# Altium PCB PCB_THALIA.PcbDoc
Units mil, origin at the board's own origin, x right, y up, seen from the top; angles counter-clockwise.
Board outline 1184.87 x 1635 mil, 2 copper layers (Top Layer, Bottom Layer); 32 components, 24 nets, 103 pads, 9 vias.
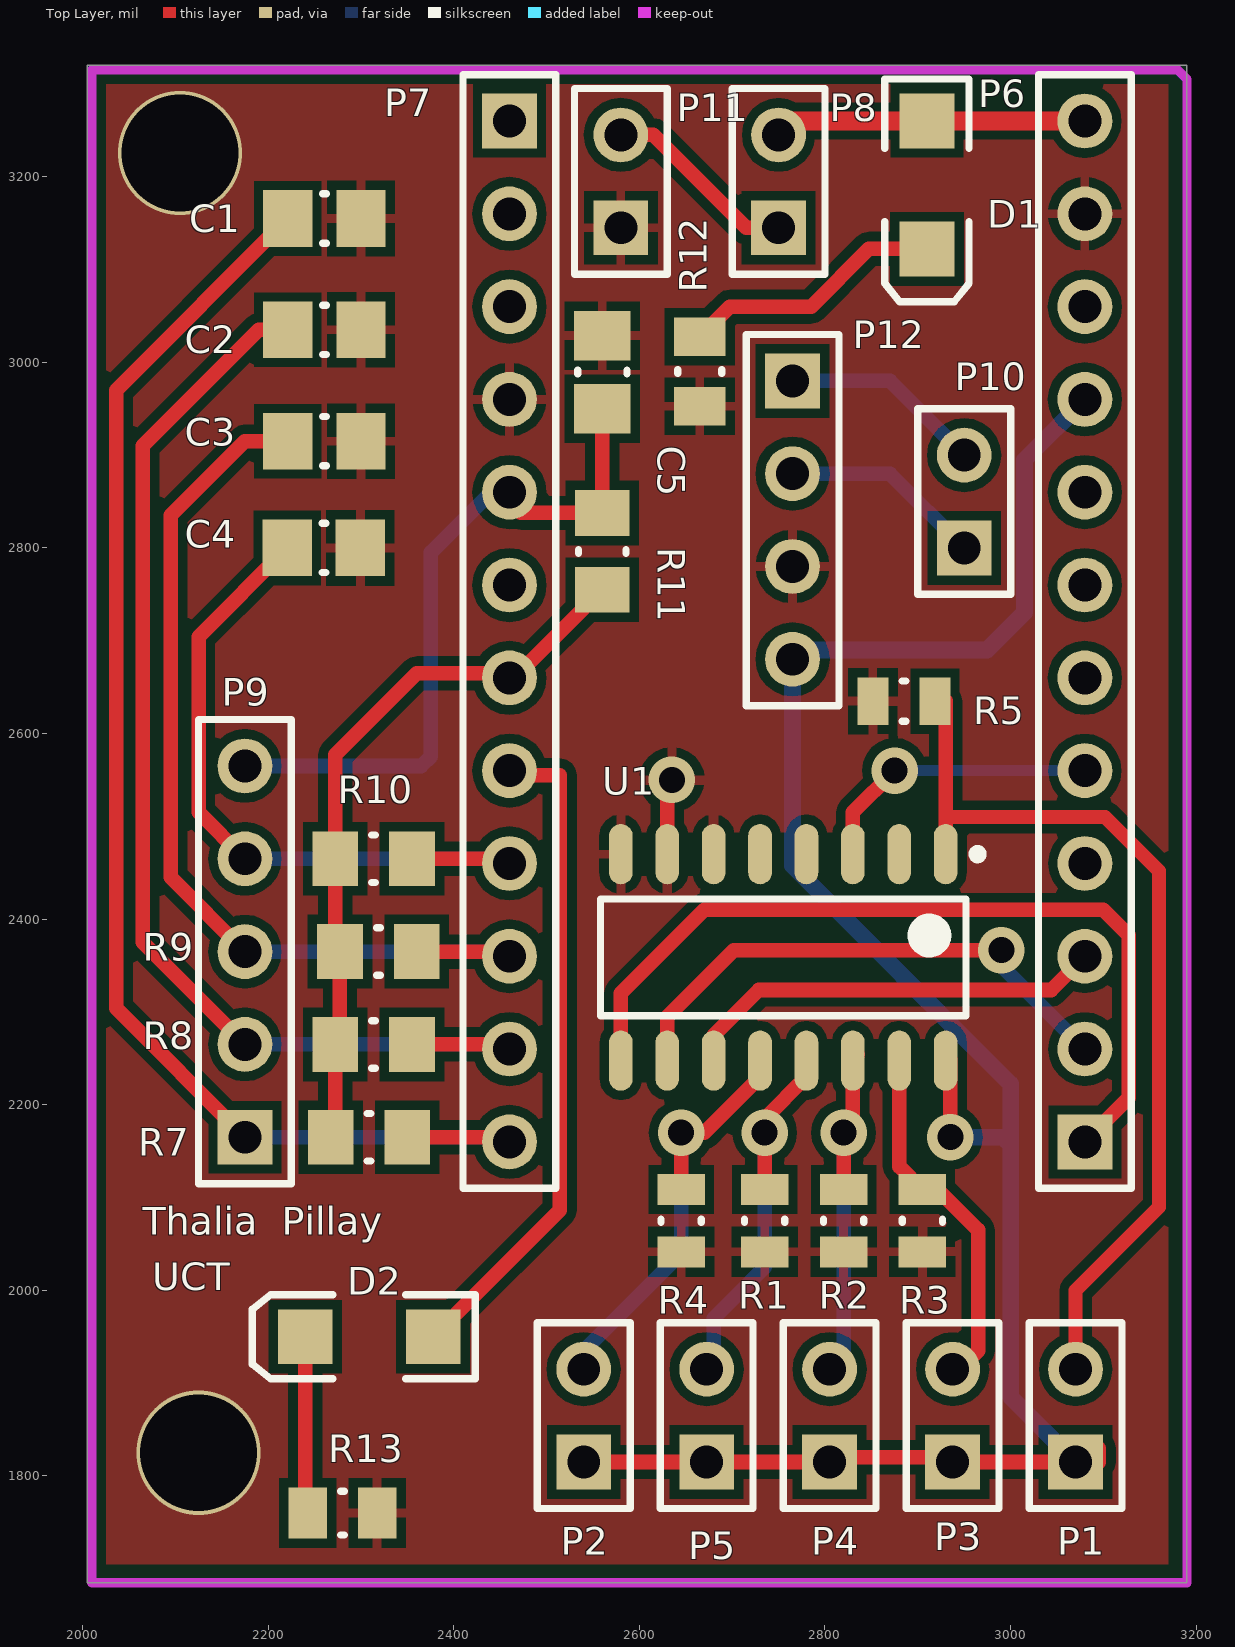
[diagram p0: Top Layer view]
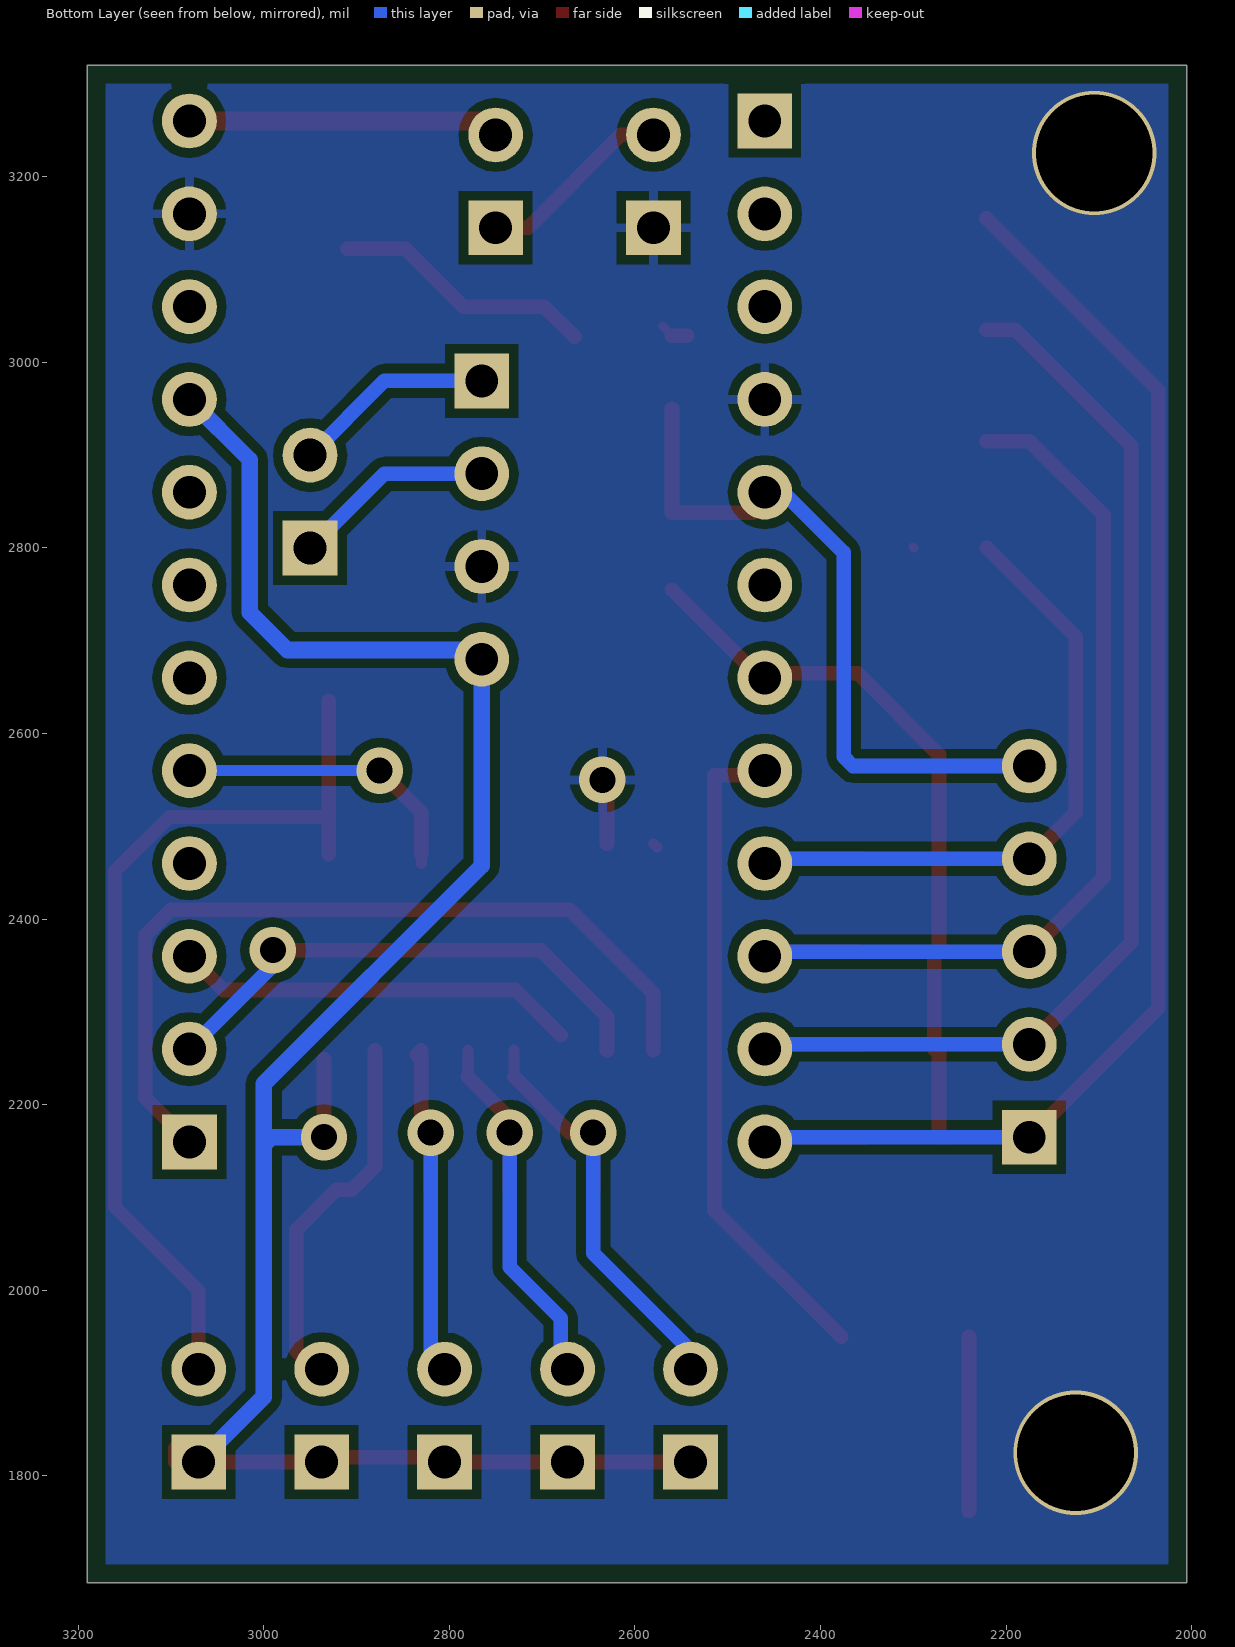
[diagram p1: Bottom Layer view, seen from below]

## Layer stack, top to bottom
Top Solder: solder mask 0.4, Solder Resist, Dk 3.5
Top Layer: signal copper 1.4
Dielectric 1: dielectric 12.6, FR-4, Dk 4.8
Bottom Layer: signal copper 1.4
Bottom Solder: solder mask 0.4, Solder Resist, Dk 3.5

## Board outline
2005.13,3320 3190,3320 3190,1685 2005.13,1685

## Design rules (kind name [scope] priority, off if disabled: settings)
BoardOutlineClearance [All] p1: gap=19.68 ignorepadtopadclearanceinfootprint=FALSE
Clearance [All] p1: gap=10 ignorepadtopadclearanceinfootprint=FALSE except(0: Arc-Hole Track-Hole SMDPad-Hole THPad-Hole Via-Hole Fill-Hole Poly-Hole Region-Hole Text-Hole)
PolygonConnect [All] p1: connectstyle=Relief reliefconductorwidth=10 reliefentries=4 polygonreliefangle="90 Angle" airgapwidth=10
RoutingVias [All] p1: holewidth=28 width=50 viastyle="Through Hole" minholewidth=28 minwidth=50 maxholewidth=28 maxwidth=50
SolderMaskExpansion [All] p1: expansion=4
Width [All] p1: maxlimit=78.74 minlimit=11.81 preferedwidth=15.75
30 further rules are at their usual default settings.

## Components (designator, comment, footprint, x,y, rotation, side; value= is the part's Value field where it differs from the comment)
C1 "CAP 100pF 10V 0805(2012)" CAPC0805(2012)100_M 2260.63,3155 r180 top value=100pF
C2 "CAP 100pF 10V 0805(2012)" CAPC0805(2012)100_M 2260.63,3035 r180 top value=100pF
C3 "CAP 100pF 10V 0805(2012)" CAPC0805(2012)100_M 2260.63,2915 r180 top value=100pF
C4 "CAP 100pF 10V 0805(2012)" CAPC0805(2012)100_M 2260,2800 r180 top value=100pF
C5 "CAP 100pF 10V 0805(2012)" CAPC0805(2012)100_M 2560,2989.37 r270 top value=100pF
D1 "GREEN" 3.2X1.6X1.1 2909.8,3191.1 r270 top (schematic designator D?)
D2 "GREEN" 3.2X1.6X1.1 2308.9,1950 r180 top
P1 "pinky" HDR1X2 3070,1815 r90 top
P2 "ring" HDR1X2 2540,1815 r90 top
P3 "middle" HDR1X2 2937.5,1815 r90 top
P4 "index" HDR1X2 2805,1815 r90 top
P5 "thumb" HDR1X2 2672.5,1815 r90 top
P6 "Header 12" HDR1X12 3080,2160 r90 top
P7 "Header 12" HDR1X12 2460,3260 r270 top
P8 "TOGGLE" HDR1X2 2750,3145 r90 top
P9 "Header 5" HDR1X5 2175,2165 r90 top
P10 "IMU HEADER" HDR1X2 2950,2800 r90 top
P11 "BATTERY" HDR1X2 2580,3145 r90 top
P12 "ADAFRUIT BNO055" HDR1X4 2765,2980 r270 top
R1 "47K 5% 0805(2012)" RESC0805(2012)_L 2735,2075 r90 top value="47000.00 Ohm"
R2 "47K 5% 0805(2012)" RESC0805(2012)_L 2820,2075 r90 top value="47000.00 Ohm"
R3 "47K 5% 0805(2012)" RESC0805(2012)_L 2905,2075 r90 top value="47000.00 Ohm"
R4 "47K 5% 0805(2012)" RESC0805(2012)_L 2645,2075 r90 top value="47000.00 Ohm"
R5 "47K 5% 0805(2012)" RESC0805(2012)_L 2885,2635 r0 top value="47000.00 Ohm"
R7 "10M 5% 0805(2012)" RESC0805(2012)_M 2308.66,2165 r180 top value="10000000.00 Ohm"
R8 "10M 5% 0805(2012)" RESC0805(2012)_M 2313.66,2265 r180 top value="10000000.00 Ohm"
R9 "10M 5% 0805(2012)" RESC0805(2012)_M 2318.66,2365 r180 top value="10000000.00 Ohm"
R10 "10M 5% 0805(2012)" RESC0805(2012)_M 2313.66,2465 r180 top value="10000000.00 Ohm"
R11 "10M 5% 0805(2012)" RESC0805(2012)_M 2560,2796.34 r270 top value="10000000.00 Ohm"
R12 "240R 5% 0805(2012)" RESC0805(2012)_N 2665,2990 r90 top value="240.00 Ohm"
R13 "240R 5% 0805(2012)" RESC0805(2012)_N 2280,1760 r180 top value="240.00 Ohm"
U1 "CD4051BM96G3" D0016A_M 2755,2358.78 r270 top

## Footprints (in the part's own frame and the unit in brackets; to place one, negate y for a bottom-side part, rotate by r counter-clockwise, add the part's x,y. Pads: shape width x height; smd on the part's side, far side on the other; paste and mask are expansions set on the pad)
3.2X1.6X1.1 [mm] "SMT LED; 2 Flat Leads"
  rect 1.5x1.5 smd: 1(-1.75,0) 2(1.75,0)
  silkscreen extent -2.9,-1.15 3.2,1.15
CAPC0805(2012)100_M [mm] "Chip Capacitor, Body 2.0x1.2mm, Height 1.0mm, IPC Low Density"
  rect 1.35x1.55 smd: 1(-1,0) 2(1,0)
  silkscreen extent -0.05,-0.67 0.05,0.67, body extent -1.1,-0.72 1.1,0.72, height 1
D0016A_M [mm] "SOIC, 16-Leads, Body 10x4mm, Pitch 1.27mm, IPC Low Density"
  oval 1.65x0.65 smd: 1(-2.825,4.445) 2(-2.825,3.175) 3(-2.825,1.905) 4(-2.825,0.635) 5(-2.825,-0.635) 6(-2.825,-1.905) 7(-2.825,-3.175) 8(-2.825,-4.445) 9(2.825,-4.445) 10(2.825,-3.175) 11(2.825,-1.905) 12(2.825,-0.635) 13(2.825,0.635) 14(2.825,1.905) 15(2.825,3.175) 16(2.825,4.445)
  silkscreen extent -2.95,-5 1.6,5.45, body extent -3,-4.95 3,4.95, height 1.59
HDR1X2 [mm] "Connector; Header; 2 Position"
  rect 1.5x1.5 hole 0.9: 1(0,0)
  round 1.5 hole 0.9: 2(2.54,0)
  silkscreen extent -1.27,-1.27 3.81,1.27
HDR1X4 [mm] "Connector; Header; 4 Position"
  rect 1.5x1.5 hole 0.9: 1(0,0)
  round 1.5 hole 0.9: 2(2.54,0) 3(5.08,0) 4(7.62,0)
  silkscreen extent -1.27,-1.27 8.89,1.27
HDR1X5 [mm] "Connector; Header; 5 Position"
  rect 1.5x1.5 hole 0.9: 1(0,0)
  round 1.5 hole 0.9: 2(2.54,0) 3(5.08,0) 4(7.62,0) 5(10.16,0)
  silkscreen extent -1.27,-1.27 11.43,1.27
HDR1X12 [mm] "Connector; Header; 12 Position"
  rect 1.5x1.5 hole 0.9: 1(0,0)
  round 1.5 hole 0.9: 2(2.54,0) 3(5.08,0) 4(7.62,0) 5(10.16,0) 6(12.7,0) 7(15.24,0) 8(17.78,0) 9(20.32,0) 10(22.86,0) 11(25.4,0) 12(27.94,0)
  silkscreen extent -1.27,-1.27 29.21,1.27
RESC0805(2012)_L [mm] "Chip Resistor, Body 2.0x1.3mm, IPC High Density"
  rect 0.85x1.3 smd: 1(-0.85,0) 2(0.85,0)
  silkscreen extent -0.05,-0.55 0.05,0.55, body extent -1.1,-0.67 1.1,0.68, height 0.7
RESC0805(2012)_M [mm] "Chip Resistor, Body 2.0x1.3mm, IPC Low Density"
  rect 1.25x1.5 smd: 1(-1.05,0) 2(1.05,0)
  silkscreen extent -0.05,-0.65 0.05,0.65, body extent -1.1,-0.67 1.1,0.67, height 0.7
RESC0805(2012)_N [mm] "Chip Resistor, Body 2.0x1.3mm, IPC Medium Density"
  rect 1.05x1.4 smd: 1(-0.95,0) 2(0.95,0)
  silkscreen extent -0.05,-0.6 0.05,0.6, body extent -1.1,-0.67 1.1,0.68, height 0.7

## Part data
C1 C2 C3 C4 C5: library part CMP-1036-01932-1, "CAP 100pF 10V ±5% 0805 (2012 Metric) Thickness 1mm SMD", Case-EIA=0805, Case-Metric=2012, Rated Voltage="10 V", Tolerance=±5%, Max Thickness="1 mm", Technology=SMT
D1 D2: library part LED2, "Typical RED, GREEN, YELLOW, AMBER GaAs LED", LatestRevisionDate=17-Jul-2002, LatestRevisionNote="Re-released for DXP Platform.", PackageDescription="SM LED; 2 Flat Leads", PackageReference=3.2X1.6X1.1, PackageVersion=Feb-2002, Published=8-Jun-2000, Publisher="Altium Limited"
P1 P2 P3 P4 P5 P8 P10 P11: library part "Header 2", "Header, 2-Pin", LatestRevisionDate=17-Jul-2002, LatestRevisionNote="Re-released for DXP Platform.", Publisher="Altium Limited"
P6 P7: "Header, 12-Pin", LatestRevisionDate=17-Jul-2002, LatestRevisionNote="Re-released for DXP Platform.", Publisher="Altium Limited"
P9: "Header, 5-Pin", LatestRevisionDate=17-Jul-2002, LatestRevisionNote="Re-released for DXP Platform.", Publisher="Altium Limited"
P12: library part "Header 4", "Header, 4-Pin", LatestRevisionDate=17-Jul-2002, LatestRevisionNote="Re-released for DXP Platform.", Publisher="Altium Limited"
R1 R2 R3 R4 R5: library part CMP-1013-00114-1, "47K 0.125W 5% 0805 (2012 Metric)  SMD", Case-EIA=0805, Case-Metric=2012, Power="0.125 W", Tolerance="5 %", Technology=SMT
R7 R8 R9 R10 R11: library part CMP-1013-00170-1, "10M 0.125W 5% 0805 (2012 Metric)  SMD", Case-EIA=0805, Case-Metric=2012, Power="0.125 W", Tolerance="5 %", Technology=SMT
R12 R13: library part CMP-1013-00059-1, "240R 0.125W 5% 0805 (2012 Metric)  SMD", Case-EIA=0805, Case-Metric=2012, Power="0.125 W", Tolerance="5 %", Technology=SMT
U1: library part CMP-1575-00039-2, "CMOS Single 8-Channel Analog Multiplexer/Demultiplexer with Logic-Level Conversion, D0016A, LARGE T&R", Operating Temperature Range(C)="-55 to 125", Part Number=CD4051B, Rating=Military, Bandwidth(Max)(MHz)=20, Code_IPC="MS-012 variation AC", ComponentLink1Description="Manufacturer URL", ComponentLink1URL=http://www.ti.com/, ComponentLink2Description=Datasheet, ComponentLink2URL=http://www.ti.com/lit/ds/symlink/cd4051b.pdf, Configuration="1 X 1:8 MUX", Crosstalk=Yes, DatasheetVersion=SCHS047G, ICC(Typ)(mA)=0.00008, Output Drive (IOL/IOH)(Max)(mA)=1, Output Type=CMOS, PackageReference=D0016A, PackageVersion=http://www.ti.com/lit/ml/mpds178g/mpds178g.pdf, PartNumber=CD4051BM96G3, Ron(Max)(Ohms)=240, Ron(Typ)(Ohms)=125, VCC(Max)(V)=18, VCC(Min)(V)=5

## Via types
v1: diameter 50, hole 28, Top Layer to Bottom Layer, tented top, 4 vias
v2: diameter 50, hole 28, Top Layer to Bottom Layer, 3 vias
v3: diameter 133.86, hole 125.98, Top Layer to Bottom Layer, 2 vias

## Nets (pads, with @x,y where several pads share a name; then routed paths per layer and width w, separated by ;. In a path a pad name is that pad's centre, name@x,y a point inside that pad or via, vN(x,y) a via of type N, cw(c..) or ccw(c..) an arc to the next point about the centre after c; other vN are vias at no path point)
A0: P6.5 U1.3 | length 323.6
  Top Layer w11.81: U1.3@2830,2460 U1.3
  Top Layer w15.75: U1.3 2830,2515 v1(2875,2560)
  Bottom Layer w11.81: v1(2875,2560) P6.5
A4: P10.1 P12.2 | length 218.1
  Bottom Layer w15.75: P12.2 2870,2880 P10.1
A5: P10.2 P12.1 | length 218.1
  Bottom Layer w15.75: P12.1 2870,2980 P10.2
GND: C1.1 C2.1 C3.1 C4.1 C5.1 P6.11 P7.4 P11.1 P12.3 R1.1 R2.1 R3.1 R4.1 R5.1 R12.1 R13.1 U1.6 U1.7 U1.8 | length 132.5
  Top Layer w10: C4.1 C4.1@2300,2800.63 ; C5.1 C5.1@2570,3038.74
  Top Layer w11.81: U1.8@2576.22,2477.44 U1.8@2580,2481.22
  Top Layer w15.75: P7.4@2460,2965 P7.4@2480,2965 ; C5.1@2543.74,3028.74 C5.1 ; U1.7@2630,2481.22 2630,2545 v1(2635,2550) ; P12.3@2760,2780 P12.3
  other v3: 2125,1825 2105,3225.47
NetD1_2: D1.2 R12.2 | length 284.1
  Top Layer w15.75: R12.2 2697.6,3060 2785,3060 2847.2,3122.2 D1.2
NetD2_2: D2.2 R13.2 | length 191.1
  Top Layer w10: R13.2@2240,1762.6 R13.2
  Top Layer w15.75: R13.2@2240,1762.6 D2.2
NetP1_2: P1.2 R5.2 U1.1 | length 993.1
  Top Layer w15: 2930,2510 3101.65,2510 3160,2451.65 3160,2090 3070,2000 P1.2
  Top Layer w15.75: U1.1 2930,2510 R5.2@2930,2635
NetP2_2: P2.2 R4.2 U1.12 | length 498.7
  Top Layer w11.81: v2(2645,2170) 2670,2170 ; U1.12@2730,2230 U1.12 U1.12@2730,2258.78
  Top Layer w15.75: R4.2 v2(2645,2170) ; 2670,2170 U1.12@2730,2230
  Bottom Layer w11.81: P2.2 P2.2@2540,1935
  Bottom Layer w15.75: P2.2@2540,1935 2645,2040 v2(2645,2170)
NetP3_2: P3.2 R3.2 U1.15 | length 397
  Top Layer w15.75: U1.15@2880,2258.78 2880,2133.46 R3.2 2921.54,2108.46 2965,2065 2965,1935 P3.2@2945,1915
NetP4_2: P4.2 R2.2 U1.14 | length 418.6
  Top Layer w15.75: R2.2 v2(2820,2170) 2830,2180 2830,2258.78 U1.14@2835,2253.78
  Bottom Layer w15.75: P4.2@2815,1915 2820,1920 v2(2820,2170)
NetP5_2: P5.2 R1.2 U1.13 | length 446.7
  Top Layer w11.81: v2(2735,2170) v2@2735,2185 ; U1.13@2780,2230 U1.13@2780,2258.78
  Top Layer w15.75: R1.2 v2(2735,2170) ; v2@2735,2185 U1.13@2780,2230
  Bottom Layer w15.75: P5.2@2680,1915 2680,1970 2735,2025 v2(2735,2170)
NetP8_1: P8.1 P11.2 | length 221.4
  Top Layer w15.75: P11.2@2570,3245 P11.2 2615,3245 2715,3145 P8.1
PIN2: C5.2 P7.5 P9.5 R11.1 | length 761.8
  Top Layer w15.75: P7.5@2445,2865 2472.32,2837.68 R11.1 C5.2
  Bottom Layer w15.75: P9.5 2365,2565 2375,2575 2375,2795 P7.5@2445,2865
PIN4: P7.7 R7.2 R8.2 R9.2 R10.2 R11.2 | length 789.8
  Top Layer w10: P7.7@2445,2665 P7.7@2470,2665
  Top Layer w11.81: R8.2@2272.32,2255 R8.2@2277.32,2260
  Top Layer w15.75: R7.2 2272.32,2170 2272.32,2255 R8.2 ; R8.2@2277.32,2260 R9.2 2272.32,2370 R10.2 2272.32,2577.32 2360,2665 P7.7@2445,2665 ; P7.7@2470,2665 R11.2
PIN5: D2.1 P7.8 | length 734.9
  Top Layer w10: P7.8@2445,2565 P7.8@2455,2555
  Top Layer w15.75: D2.1 2514.25,2086.46 2514.25,2555 P7.8@2455,2555
PIN6: C4.2 P7.9 P9.4 R10.1 | length 755.3
  Top Layer w15.75: P9.4 2125,2515 2125,2704.37 C4.2 ; R10.1 P7.9@2445,2465
  Bottom Layer w15.75: P9.4 P7.9@2445,2465
PIN7: C3.2 P7.10 P9.3 R9.1 | length 1017.5
  Top Layer w15.75: P9.3 2095,2445 2095,2835 2175,2915 C3.2 ; R9.1 P7.10@2445,2365
  Bottom Layer w15.75: P9.3 P7.10@2445,2365
PIN8: C2.2 P7.11 P9.2 R8.1 | length 1258.6
  Top Layer w15.75: P9.2 2065,2375 2065,2910 2190,3035 C2.2 ; R8.1 P7.11@2445,2265
  Bottom Layer w15.75: P9.2 P7.11@2445,2265
PIN9: C1.2 P7.12 P9.1 R7.1 | length 1489.1
  Top Layer w15.75: P9.1 2036.22,2303.78 2036.22,2969.96 C1.2 ; R7.1 P7.12@2445,2165
  Bottom Layer w15.75: P9.1 P7.12@2445,2165
PIN10: P6.1 U1.9 | length 918
  Top Layer w15.75: U1.9@2580,2258.78 2580,2320 2670,2410 3100,2410 3127.4,2382.6 3127.4,2207.4 P6.1 P6.1@3066.93,2173.07
PIN11: P6.2 U1.10 | length 589.9
  Top Layer w15.75: U1.10@2630,2258.78 2630,2295 2701.5,2366.5 v1(2990,2366.5)
  Bottom Layer w15.75: v1(2990,2366.5) 2976.5,2366.5 2975,2365 P6.2
PIN12: P6.3 U1.11 | length 435.2
  Top Layer w15.75: U1.11@2680,2275 2728.62,2323.62 3043.62,2323.62 P6.3
RAW: D1.1 P6.12 P8.2 | length 336.2
  Top Layer w20: P8.2 2765,3260 D1.1 P6.12
VCC: P1.1 P2.1 P3.1 P4.1 P5.1 P6.9 P12.4 U1.16 | length 2245.8
  Top Layer w10: P4.1@2800,1815 P4.1@2805,1820 ; P3.1@2940,1820 P3.1@2945,1815
  Top Layer w15.75: P2.1 P5.1 P4.1@2800,1815 ; P4.1@2805,1820 P3.1@2940,1820 ; v1(2935,2165) U1.16@2935,2248.78 ; P3.1@2945,1815 P1.1 3095,1815 P1.1@3095,1830
  Bottom Layer w11.81: P12.4 P12.4@2775,2690
  Bottom Layer w15.75: 2990,2165 3000,2155
  Bottom Layer w18: P12.4 2765,2457.5 3000,2222.5 3000,2155 3000,1885 P1.1 ; P12.4@2775,2690 2974.57,2690 3015,2730.43 3015,2895 P6.9 ; v1(2935,2165) 2990,2165
pads on no net: P6.4 P6.6 P6.7 P6.8 P6.10 P7.1 P7.2 P7.3 P7.6 U1.2 U1.4 U1.5
copper on no net: | length 708.7
  Top Layer w10: 4395,505 5103.66,505

## Polygon pours and split planes (outlines as drawn)
GND on Top Layer "Top Layer-GND" (solid, pour order 0): 2020,3305 3190,3305 3190,1685 2010,1685 2010,3315
GND on Bottom Layer "Bottom Layer-GND 1" (solid, pour order 2): 2010,3310 2020,3320 3190,3320 3190,1680 3185,1685 2005,1685 2005,3320

## Keep-outs
Top Layer:
  lines w10: 2010,1685 2010,1700 2010,3315 3180,3315 3190,3305 3190,1685 2010,1685

## Silkscreen, mask and mechanical layers (free items; w line width, h text height)
Top Overlay:
  text "Thalia  Pillay" at 2065,2060 h30
  text "UCT" at 2075,2000 h30